# Altium PCB RecycleBin-4-V8.pcbdoc (part 2 of 2)
Units mm, origin at the board's own origin, x right, y up, seen from the top; angles counter-clockwise.
Board outline 100 x 100 mm, 2 copper layers (Top Layer, Bottom Layer); 155 components, 225 nets, 519 pads, 228 vias.
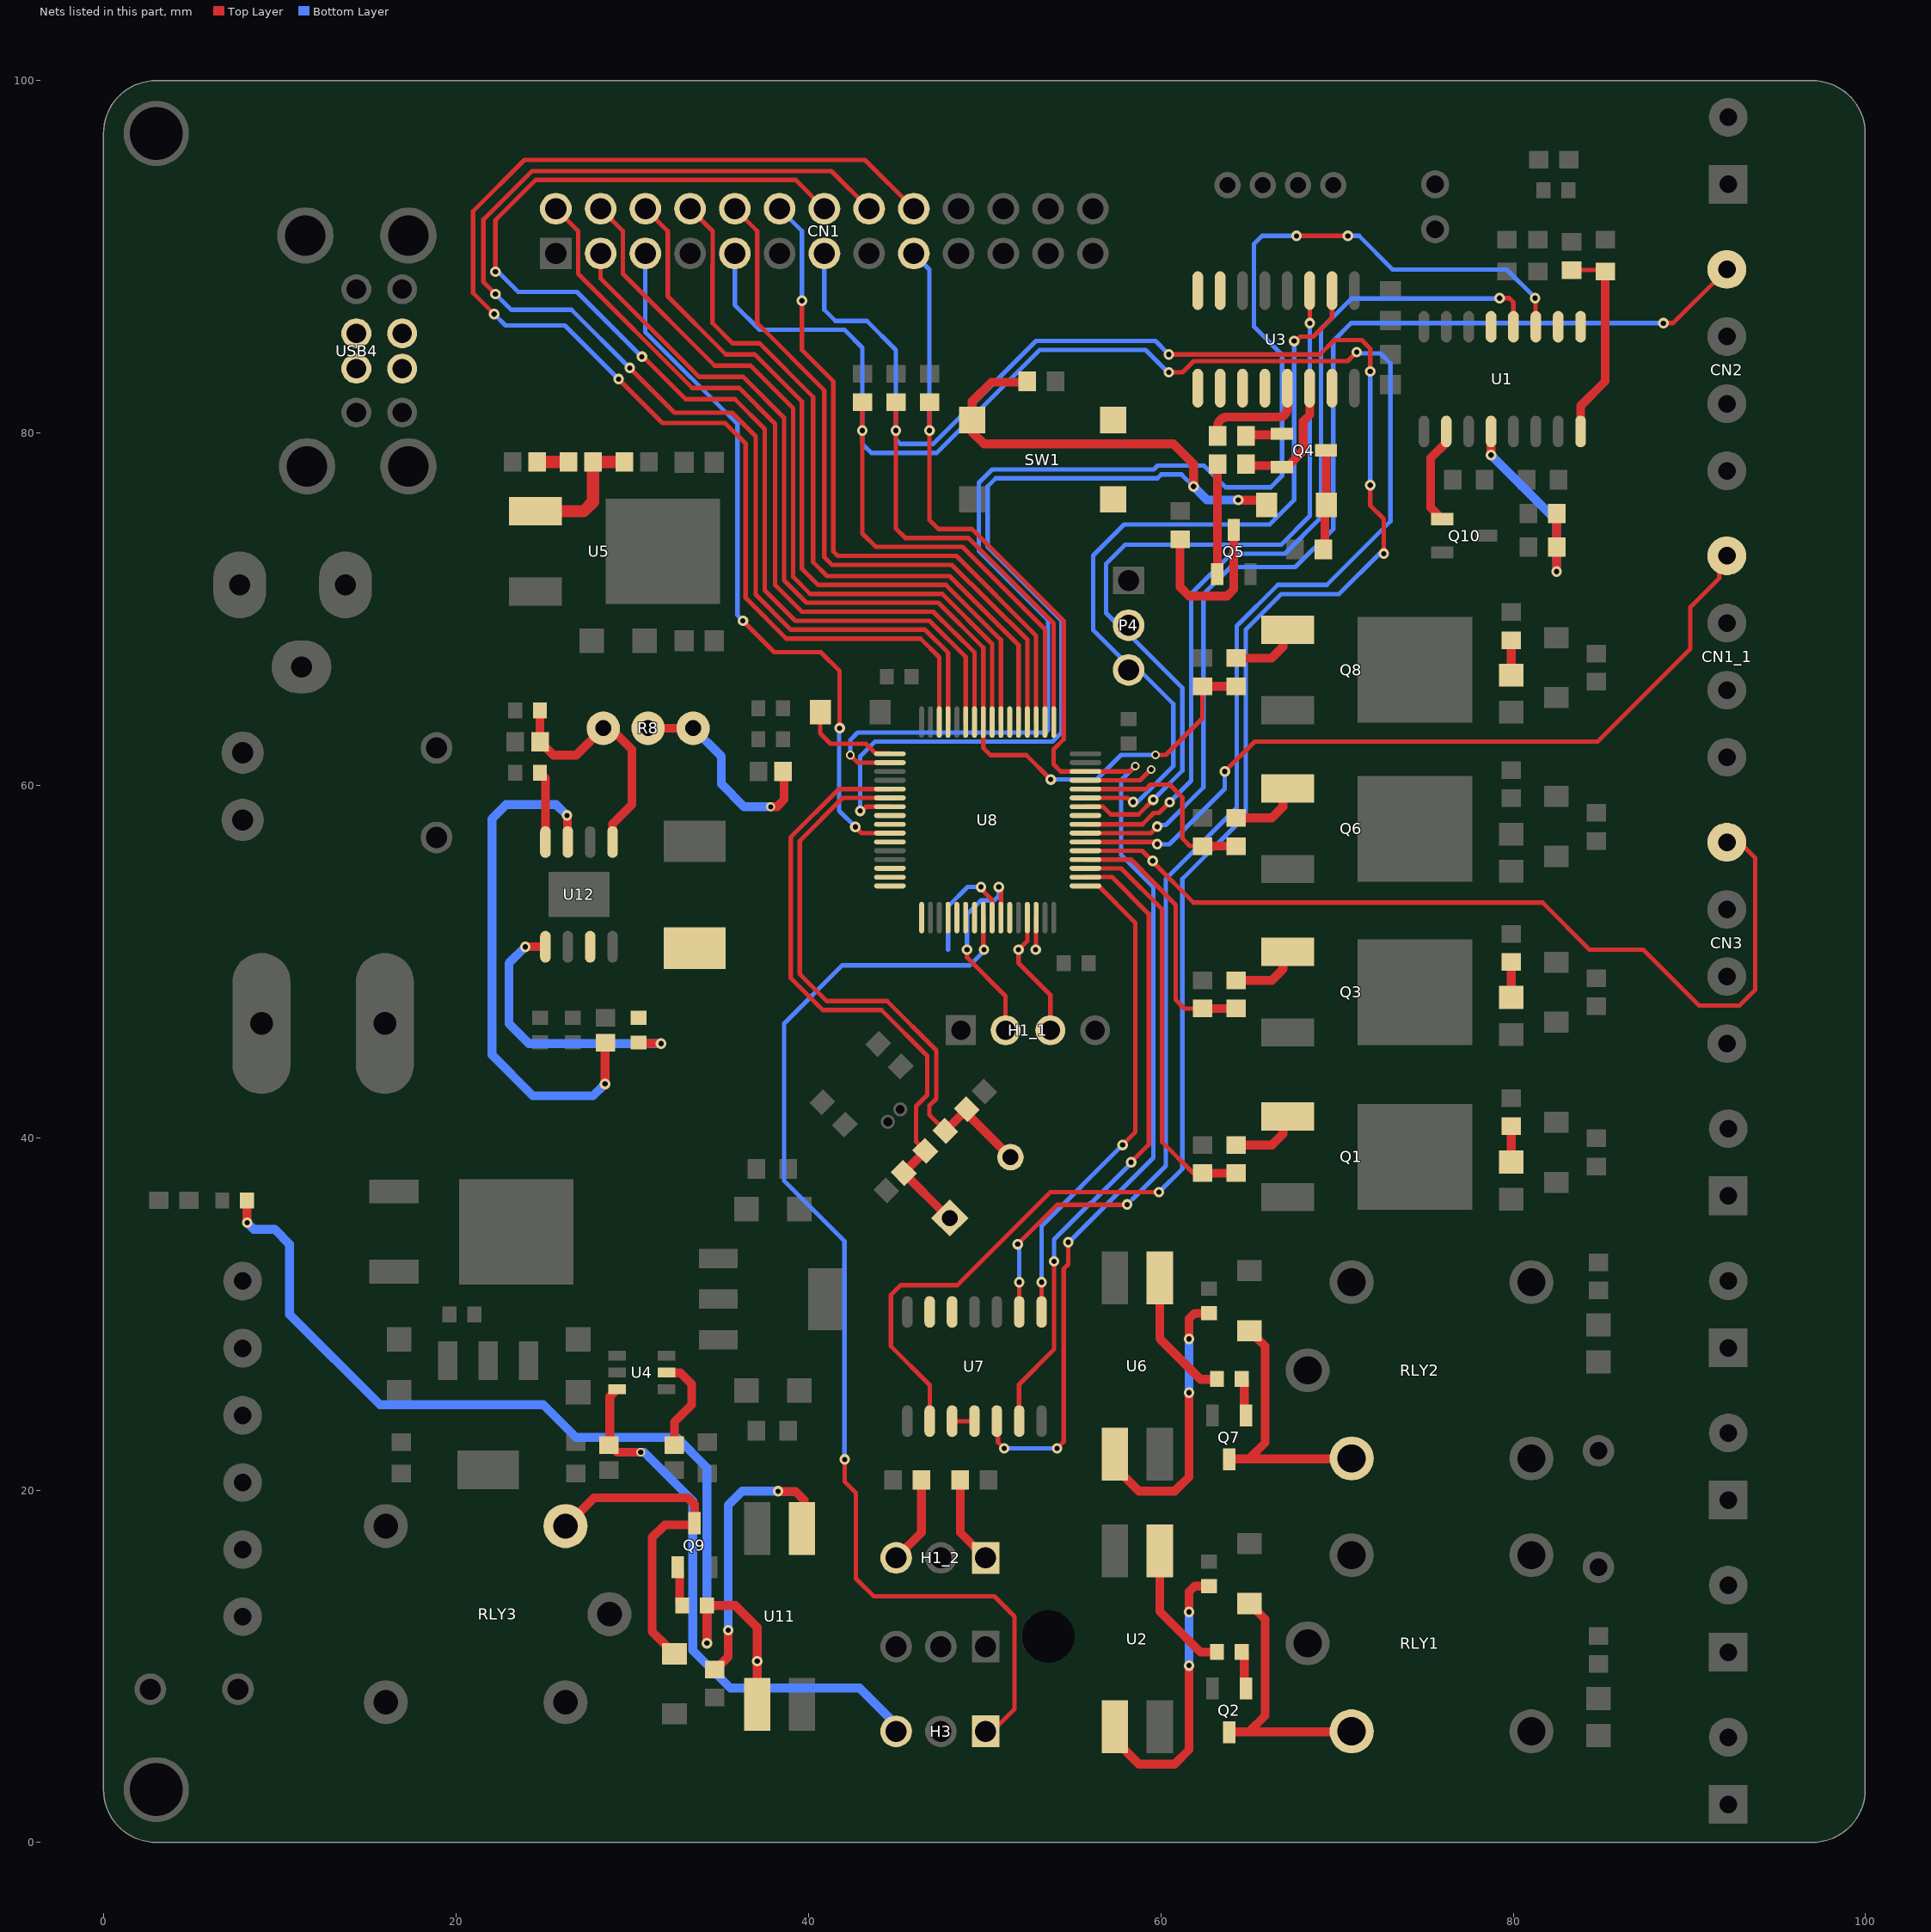
[diagram p2: the nets of this part, all layers, seen from the top]

## Via types
v1: diameter 0.6, hole 0.3, Top Layer to Bottom Layer, 152 vias
v2: diameter 0.5, hole 0.3, Top Layer to Bottom Layer, 59 vias
v3: diameter 1.2, hole 0.6, Top Layer to Bottom Layer, 10 vias
v4: diameter 0.4, hole 0.2, Top Layer to Bottom Layer, 3 vias
v5: diameter 1.5, hole 0.8, Top Layer to Bottom Layer, 2 vias
v6: diameter 3, hole 1.6, Top Layer to Bottom Layer, 2 vias

## Nets (pads, with @x,y where several pads share a name; then routed paths per layer and width w, separated by ;. In a path a pad name is that pad's centre, name@x,y a point inside that pad or via, vN(x,y) a via of type N, cw(c..) or ccw(c..) an arc to the next point about the centre after c; other vN are vias at no path point) (continued)
OSC_IN: C22.2 R48.1 U8.5 X1.1 | length 35.5
  Top Layer w0.254: U8.5@44.615,59.789 43.621,59.789 43.612,59.781 41.707,59.781 38.989,57.063 38.989,49.066 40.811,47.244 44.134,47.244 46.736,44.642 46.736,42.421 46.101,41.786 46.101,39.78 R48.1@46.627,39.253
  Top Layer w0.5: R48.1@46.627,39.253 46.627,39.238 45.402,38.013 C22.2@45.402,37.998 47.761,35.639 X1.1@47.761,35.441
OSC_OUT: C25.2 R48.2 U8.6 X1.2 | length 33.8
  Top Layer w0.254: U8.6@44.615,59.289 41.93,59.289 39.497,56.84 39.497,49.276 41.021,47.752 44.45,47.752 47.244,44.958 47.244,42.21 46.863,41.829 46.863,41.287 47.759,40.391 R48.2@47.759,40.385
  Top Layer w0.5: R48.2@47.759,40.391 C25.2@48.984,41.617 ; C25.2@48.984,41.624 C25.2@48.984,41.617 ; X1.2@51.463,38.89 48.984,41.369 C25.2@48.984,41.617
OUT_HALL: 
OUT_LM: 
PA0: U8.14
PA1: U8.15
PA2: U8.16
PA3: U8.17
PA4: U8.20
PA5: U8.21
PA6: U8.22
PA7: U8.23
PA8: U8.41
PA11: R20.1 R21.1 U8.44 | length 11.5
  Top Layer w0.254: U8.44@55.715,59.789 59.147,59.789 59.397,60.039 60.491,60.039 61.214,59.316 61.214,56.985 61.651,56.548 R21.1@62.357,56.548
  Top Layer w0.5: R21.1@62.357,56.548 R20.1@64.262,56.548
PA12: U8.45 | length 4
  Top Layer w0.254: U8.45@55.715,60.289 58.817,60.289 v2@59.447,60.919
  other v2: 59.442,60.89
PA13: CN1.17 R37.1 U7.12 U8.46 | length 88.1
  Top Layer w0.254: CN1.17@45.409,89.624 CN1.17@45.974,90.19 ; R37.1@46.813,81.75 R37.1@46.863,81.75 v1(46.863,80.137) 46.863,75.057 47.371,74.549 49.277,74.549 54.483,69.343 54.483,62.618 53.915,62.051 53.915,61.185 54.311,60.789 U8.46@55.715,60.789 58.249,60.789 v2(58.547,61.087) ; U7.12@50.685,23.911 50.751,23.845 50.751,22.72 v1(51.106,22.366) ; v1(54.102,22.366) 54.483,22.747 54.483,32.561 54.739,32.816 v1(54.739,34.066)
  Bottom Layer w0.254: CN1.17@45.974,90.19 45.974,90.156 46.863,89.267 v1(46.863,80.137) ; v1(51.106,22.366) v1(54.102,22.366) ; v1@54.737,34.036 59.563,38.862 59.563,54.229 57.739,56.053 57.739,60.279 v2(58.547,61.087)
PA14: CN1.13 R36.1 U7.9 U8.49 | length 148.9
  Top Layer w0.254: R36.1@44.957,81.75 R36.1@44.957,81.75 v1(44.958,80.137) 44.958,74.569 45.486,74.041 49.066,74.041 53.915,69.192 U8.49@53.915,63.589 ; U7.9@46.875,23.911 46.875,25.957 44.67,28.162 44.67,31.077 45.216,31.623 48.44,31.623 53.724,36.907 v1(59.888,36.907) ; v1(60.452,84.455) 69.024,84.455 69.837,85.268 71.397,85.268 71.882,84.783 v1(71.882,83.488) ; v1(71.882,77.038) 71.882,75.88 72.644,75.118 v1(72.644,73.152)
  Bottom Layer w0.254: CN1.13@40.894,90.19 40.894,86.995 41.529,86.36 43.307,86.36 44.958,84.709 v1(44.958,80.137) 44.958,79.629 45.212,79.375 47.064,79.375 52.906,85.217 59.69,85.217 v1(60.452,84.455) v1@60.533,84.455 ; v1(59.888,36.907) 61.214,38.233 61.214,54.689 64.816,58.291 64.816,68.839 66.826,70.849 70.096,70.849 72.4,73.152 v1(72.644,73.152) ; v1(71.882,77.038) v1(71.882,83.488)
PA15: CN1.9 R35.1 U7.2 U8.50 | length 142
  Top Layer w0.254: R35.1@43.053,81.75 v1(43.053,80.137) 43.053,74.295 43.815,73.533 48.74,73.533 53.415,68.858 U8.50@53.415,63.589 ; v1(51.869,33.95) 54.114,36.195 58.069,36.195 v1(58.085,36.211) ; U7.2@51.955,30.111 v1(51.955,31.797) ; v1(60.452,83.439) 61.228,83.439 61.863,84.074 70.601,84.074 v1(71.115,84.587)
  Bottom Layer w0.254: CN1.9@35.814,90.19 35.814,87.249 37.211,85.852 42.037,85.852 43.053,84.836 v1(43.053,80.137) 43.053,79.375 43.561,78.867 47.274,78.867 53.116,84.709 59.136,84.709 v1@60.406,83.439 ; v1(51.869,33.95) 51.955,33.864 v1(51.955,31.797) ; 58.373,36.499 60.277,38.403 60.277,54.689 64.308,58.72 64.308,69.049 66.633,71.374 69.413,71.374 73.025,74.986 73.025,83.947 72.451,84.521 71.181,84.521 v1(71.115,84.587)
PB0: H1_1.2 U8.26 | length 12
  Top Layer w0.254: v1(48.994,50.673) 48.994,50.231 51.181,48.044 H1_1.2@51.181,46.101 ; v1(50.8,54.229) 50.8,54.135 50.915,54.02 U8.26@50.915,52.489
  Bottom Layer w0.254: v1(48.994,50.673) 48.994,52.677 49.784,53.467 50.546,53.467 50.8,53.721 v1(50.8,54.229)
PB1: U8.27
PB3: CN1.6 U8.55 | length 42.7
  Top Layer w0.254: CN1.6@30.734,92.73 32.004,91.46 32.004,87.757 35.306,84.455 36.957,84.455 39.624,81.788 39.624,72.285 40.535,71.374 47.792,71.374 50.915,68.251 U8.55@50.915,63.589
PB4: CN1.4 U8.56 | length 43.9
  Top Layer w0.254: CN1.4@28.194,92.73 29.464,91.46 29.464,89.027 34.671,83.82 36.703,83.82 39.116,81.407 39.116,71.838 40.088,70.866 47.581,70.866 50.423,68.024 50.423,67.814 ; U8.56@50.415,63.589 50.419,67.814
PB5: CN1.3 R32.1 R33.1 U8.57 | length 61.3
  Top Layer w0.254: CN1.3@28.194,90.19 28.194,88.773 33.782,83.185 36.284,83.185 38.608,80.861 38.608,71.628 39.878,70.358 47.371,70.358 49.915,67.814 U8.57@49.915,63.589 49.915,62.12 50.324,61.711 52.363,61.711 v1(53.745,60.329) ; v2(59.69,61.722) 60.277,61.722 62.357,63.802 R32.1@62.357,65.621
  Top Layer w0.5: R32.1@62.357,65.621 R33.1@64.262,65.621
  Bottom Layer w0.254: v1(53.745,60.329) 56.346,60.329 57.74,61.722 v2(59.69,61.722)
PB6: CN1.2 U8.58 | length 44.9
  Top Layer w0.254: CN1.2@25.654,92.73 26.924,91.46 26.924,89.027 33.401,82.55 36.068,82.55 38.1,80.518 38.1,71.374 39.624,69.85 47.073,69.85 49.415,67.542 U8.58@49.415,63.589
PB7: CN1.14 U8.59 | length 67.8
  Top Layer w0.254: v1(22.225,89.154) 22.225,92.075 24.511,94.361 39.263,94.361 CN1.14@40.894,92.73 ; v1@30.572,84.363 33.02,81.915 35.814,81.915 37.507,80.222 37.507,71.079 39.244,69.342 46.863,69.342 48.915,67.29 U8.59@48.915,63.589
  Bottom Layer w0.254: v1@22.372,89.154 23.515,88.011 26.855,88.011 v1(30.538,84.328)
PB8: CN1.16 U8.61 | length 71.8
  Top Layer w0.254: v1@22.151,87.884 v1(22.225,87.884) 21.544,88.565 21.544,92.112 24.301,94.869 39.473,94.869 41.295,94.869 CN1.16@43.434,92.73 ; v1(29.845,83.693) 32.385,81.153 35.651,81.153 36.999,79.805 36.999,70.824 38.989,68.834 46.609,68.834 47.915,67.528 U8.61@47.915,63.589
  Bottom Layer w0.254: v1(22.225,87.884) 23.114,86.995 26.543,86.995 v1(29.845,83.693)
PB9: CN1.18 U8.62 | length 76.2
  Top Layer w0.254: v1(22.151,86.747) 20.955,87.943 20.955,92.583 23.876,95.504 ; 24.257,95.504 23.876,95.504 ; v1(29.21,83.058) 31.702,80.566 35.258,80.566 36.43,79.394 36.43,70.631 38.735,68.326 46.355,68.326 47.415,67.266 U8.62@47.415,63.589 ; CN1.18@45.974,92.73 43.2,95.504 23.876,95.504
  Bottom Layer w0.254: v1(22.151,86.747) 22.792,86.106 26.162,86.106 v1(29.21,83.058)
PB10: H1_1.3 U8.29 | length 7.3
  Top Layer w0.254: U8.29@52.415,52.489 52.415,51.173 v1(51.915,50.673) 51.915,49.908 53.721,48.102 H1_1.3@53.721,46.101
PB11: U8.30 | length 1.8
  Top Layer w0.254: v1(52.892,50.673) 52.915,50.696 U8.30@52.915,52.489
PB12: U7.1 U8.33 | length 28
  Top Layer w0.254: U7.1@53.225,30.111 v1(53.225,31.797) ; U8.33@55.715,54.289 55.727,54.277 56.467,54.277 58.547,52.197 58.547,40.31 v1(57.823,39.586)
  Bottom Layer w0.254: v1(53.225,31.797) 53.225,34.988 v1(57.823,39.586) v1@57.823,39.535
PB13: U7.13 U8.34 | length 36.3
  Top Layer w0.254: U7.13@51.955,23.911 51.949,23.917 51.949,26.004 53.936,27.991 v1(53.936,32.977) ; U8.34@55.715,54.789 57.225,54.789 59.309,52.705 59.309,39.608 v1@58.182,38.481
  Bottom Layer w0.254: v1(53.936,32.977) 53.936,34.226 56.004,36.294 56.05,36.294 58.182,38.426 v1@58.182,38.481
  other v1: 58.309,38.608
PB14: R10.1 R12.1 U8.35 | length 23.5
  Top Layer w0.254: U8.35@55.715,55.289 57.741,55.289 60.071,52.959 60.071,39.751 61.835,37.987 R12.1@62.357,37.987
  Top Layer w0.5: R12.1@62.357,37.987 R10.1@64.262,37.987
PB15: R5.1 R6.1 U8.36 | length 15.2
  Top Layer w0.254: U8.36@55.715,55.789 58.293,55.789 60.833,53.213 60.833,47.83 61.33,47.333 R6.1@62.357,47.333
  Top Layer w0.5: R6.1@62.357,47.333 R5.1@64.262,47.333
PC0: U8.8
PC2: CN1.5 U8.10 | length 41.3
  Top Layer w0.254: v1(36.275,69.342) 38.053,67.564 40.691,67.564 41.758,66.497 41.758,66.422 41.762,66.418 v1(41.762,63.246) ; v1@42.747,57.635 v1(42.654,57.635) 43,57.289 U8.10@44.615,57.289
  Bottom Layer w0.254: CN1.5@30.734,90.19 30.734,85.725 35.961,80.498 35.961,69.656 v1(36.275,69.342) ; v1(41.762,63.246) 41.733,63.216 41.733,58.556 v1(42.654,57.635)
PC3: U8.11
PC4: H3.1 U8.24 | length 65.1
  Top Layer w0.254: v1(42.054,21.74) 42.054,20.474 42.685,19.843 42.685,14.978 43.693,13.97 50.546,13.97 51.689,12.827 51.689,7.565 H3.1@50.431,6.307 ; U8.24@49.915,52.489 49.915,50.84 v1@49.955,50.8
  Bottom Layer w0.254: v1(42.054,21.74) 42.037,21.758 42.037,34.125 38.608,37.554 38.608,46.482 41.91,49.784 49.149,49.784 49.955,50.59 v1(49.955,50.673) v1@49.955,50.8
PC5: U8.25 | length 6.8
  Top Layer w0.254: v1(49.784,54.229) 49.85,54.163 49.85,54.049 50.415,53.484 U8.25@50.415,52.489
  Bottom Layer w0.254: 47.915,50.673 47.915,53.122 49.022,54.229 v1(49.784,54.229)
PC6: CN3.4 U8.37 | length 51.9
  Top Layer w0.254: U8.37@55.715,56.289 58.936,56.289 v1@59.518,55.708 ; v1@59.635,55.808 59.635,55.554 61.849,53.34 81.661,53.34 84.328,50.673 87.376,50.673 90.551,47.498 92.837,47.498 93.726,48.387 93.726,55.88 92.837,56.769 CN3.4@92.122,56.769 CN3.4@91.741,56.769
  other v1: 59.535,55.708
PC7: CN1_1.4 U8.38 | length 44.7
  Top Layer w0.254: U8.38@55.715,56.789 59.662,56.789 v1(59.789,56.662) ; v1(63.627,60.789) 65.322,62.484 84.789,62.484 90.043,67.738 90.043,70.104 91.694,71.755 CN1_1.4@91.694,72.263
  Bottom Layer w0.254: v1@59.804,56.647 60.472,56.647 63.627,59.802 v1(63.627,60.789)
PC8: CN2.4 U8.39 | length 62.1
  Top Layer w0.254: U8.39@55.715,57.289 59.42,57.289 v1(59.789,57.658) ; v1(88.519,86.233) 89.074,86.233 91.741,88.9 CN2.4@91.741,89.281
  Bottom Layer w0.254: v1@59.831,57.743 60.277,57.743 62.414,59.88 62.414,70.849 63.955,72.39 67.628,72.39 69.786,74.548 69.786,85.217 70.802,86.233 v1(88.519,86.233)
PC9: U1.12 U8.40 | length 50.6
  Top Layer w0.254: U8.40@55.715,57.789 58.951,57.789 59.595,58.434 59.888,58.434 v1(60.493,59.039) ; v1(79.225,87.653) 79.766,87.653 80.01,87.409 U1.12@80.01,86.03
  Bottom Layer w0.254: v1(60.493,59.039) 61.722,60.268 61.722,70.875 63.999,73.152 67.036,73.152 69.088,75.204 69.088,85.905 70.813,87.63 v1@79.225,87.63
PC10: CN1.12 U8.51 | length 39.1
  Top Layer w0.254: v1(39.624,87.503) 39.624,84.709 41.402,82.931 41.402,73.279 41.656,73.025 48.387,73.025 52.915,68.497 U8.51@52.915,63.589
  Bottom Layer w0.254: CN1.12@38.354,92.73 39.624,91.46 v1(39.624,87.503)
PC11: CN1.10 U8.52 | length 40
  Top Layer w0.254: CN1.10@35.814,92.73 37.084,91.46 37.084,86.233 40.894,82.423 40.894,72.949 41.326,72.517 48.133,72.517 52.415,68.263 U8.52@52.415,63.589
PC12: CN1.8 U8.53 | length 41.8
  Top Layer w0.254: CN1.8@33.274,92.73 34.565,91.439 34.544,87.757 34.544,86.233 35.687,85.09 37.211,85.09 40.259,82.042 40.259,72.669 41.046,71.882 48.002,71.882 51.915,67.969 U8.53@51.915,63.589
PC13: U1.11 U8.2 | length 81.9
  Top Layer w0.254: v2(42.364,61.716) 42.791,61.289 U8.2@44.615,61.289 ; v1(67.691,91.186) v1(70.612,91.186) ; v1(81.236,87.653) 81.258,87.631 81.258,86.052 U1.11@81.28,86.03
  Bottom Layer w0.254: v2(42.364,61.716) 42.364,62.57 42.786,62.992 53.445,62.992 53.594,63.141 53.594,69.386 49.657,73.323 49.657,77.172 50.417,77.932 59.591,77.932 59.81,78.151 62.438,78.151 63.673,76.916 66.228,76.916 66.873,77.561 66.873,84.443 65.278,86.038 65.278,90.726 65.738,91.186 v1(67.691,91.186) ; v1(70.612,91.186) 71.247,91.186 73.152,89.281 79.629,89.281 v1@81.246,87.664
PD2: U8.54
Q1_1: Q1.1 R10.2 | length 4
  Top Layer w0.5: R10.2@64.262,39.586 66.294,39.586 66.929,40.221 66.929,40.939 Q1.1@67.188,41.198
Q4_1: Q4.1 R24.2 | length 2.1
  Top Layer w0.5: R24.2@64.819,79.831 64.881,79.893 66.804,79.893 Q4.1@66.867,79.956
Q4_2: Q4.2 R25.1 U3.14 | length 7.4
  Top Layer w0.5: R25.1@64.82,78.244 64.913,78.15 67.236,78.15 68.072,78.986 68.072,80.645 68.453,81.026 68.453,82.53 U3.14@68.442,82.541
Q4_3: D6.1 Q4.3 R23.1 | length 5.7
  Top Layer w0.5: R23.1@69.216,73.389 69.303,73.476 69.303,75.824 69.378,75.899 69.378,78.993 Q4.3@69.366,79.006
Q5_1: Q5.1 R25.2 | length 6.3
  Top Layer w0.5: Q5.1@63.185,71.995 63.202,72.012 63.202,78.226 R25.2@63.22,78.244
Q5_3: Q5.3 R26.2 | length 9.5
  Top Layer w0.5: R26.2@61.087,73.969 61.087,71.247 61.595,70.739 63.754,70.739 64.135,71.12 Q5.3@64.135,74.494
Q6_1: Q6.1 R20.2 | length 4
  Top Layer w0.5: R20.2@64.262,58.147 66.294,58.147 66.929,58.782 66.929,59.5 Q6.1@67.188,59.76
Q7_1: Q7.1 R18.2 | length 2.2
  Top Layer w0.5: R18.2@64.581,26.308 64.731,26.158 64.731,24.337 Q7.1@64.831,24.237
Q9_3: D10.2 Q9.3 RLY3.2 | length 19.2
  Top Layer w0.5: RLY3.2@26.203,17.954 27.807,19.558 33.147,19.558 33.528,19.177 Q9.3@33.528,18.119 Q9.3@33.528,18.018 ; D10.2@32.385,10.704 32.285,10.704 31.935,11.054 31.935,11.154 31.115,11.974 31.115,17.304 31.829,18.018 Q9.3@33.528,18.018 ; Q9.3@33.528,18.014 Q9.3@33.528,18.018
Q10_1: Q10.1 U1.2 | length 5.6
  Top Layer w0.5: Q10.1@75.966,75.118 75.311,75.773 75.311,78.571 76.2,79.46 U1.2@76.2,80.086
R5_2: Q3.1 R5.2 | length 4
  Top Layer w0.5: R5.2@64.262,48.933 66.294,48.933 66.929,49.568 66.929,50.286 Q3.1@67.188,50.545
R11_1: 
R14_1: LED4.1 R14.1 | length 2
  Top Layer w0.5: LED4.1@79.883,38.614 R14.1@79.883,40.654
R15_1: R15.1 U2.3 | length 7.7
  Top Layer w0.5: U2.3@59.93,16.557 59.93,13.118 62.249,10.799 63.162,10.799 R15.1@63.181,10.818
R15_2: Q2.1 R15.2 | length 2.2
  Top Layer w0.5: R15.2@64.581,10.814 64.731,10.664 64.731,8.843 Q2.1@64.831,8.743
R17_2: 
R18_1: R18.1 U6.3 | length 7.7
  Top Layer w0.5: U6.3@59.93,32.047 59.93,28.608 62.249,26.289 63.162,26.289 R18.1@63.181,26.308
R22_1: LED1.1 R22.1 | length 2
  Top Layer w0.5: LED1.1@79.883,47.961 R22.1@79.883,49.974
R24_1: R24.1 U3.13 | length 6.1
  Top Layer w0.5: R24.1@63.219,79.831 63.219,80.364 cw(c63.754,80.364) 63.754,80.899 66.675,80.899 ccw(c66.675,81.407) 67.183,81.407 ; U3.13@67.194,81.534 U3.13@67.194,82.541
R28_1: H1_2.1 R28.1 | length 5
  Top Layer w0.5: R28.1@48.614,20.573 48.614,17.586 H1_2.1@50.05,16.15
R29_2: H1_2.3 R29.2 | length 5
  Top Layer w0.5: H1_2.3@44.97,16.15 46.406,17.586 R29.2@46.406,20.573
R31_1: LED6.1 R31.1 | length 2
  Top Layer w0.5: LED6.1@79.883,66.249 R31.1@79.883,68.228
R32_3: R38.2 R39.1 | length 1.8
  Top Layer w0.7: R38.2@24.591,78.359 R39.1@26.366,78.359
R33_2: Q8.1 R33.2 | length 4
  Top Layer w0.5: R33.2@64.262,67.221 66.294,67.221 66.929,67.856 66.929,68.574 Q8.1@67.188,68.833
R38_2: R39.2 R41.1 U5.1 | length 7.5
  Top Layer w0.7: U5.1@24.491,75.564 27.241,75.564 27.766,76.088 R39.2@27.766,78.359 R41.1@29.533,78.359
R43_2: 
R44_1: 
R53_1: 
R54_1: R13.1 R54.1 U11.3 | length 55.5
  Top Layer w0.5: R13.1@8.124,36.449 R13.1@8.116,36.441 8.122,36.435 8.122,35.185 v1(8.128,35.179) ; v1(34.228,11.306) 34.228,13.065 34.417,13.254 R54.1@34.228,13.443 35.847,13.443 37.084,12.206 v1(37.084,10.287) U11.3@37.084,7.827
  Bottom Layer w0.5: v1(8.128,35.179) 8.513,34.794 9.698,34.794 10.541,33.951 10.541,29.972 15.675,24.838 24.946,24.838 26.797,22.987 32.512,22.987 34.228,21.271 v1(34.228,11.306)
R54_2: Q9.1 R54.2 | length 2.2
  Top Layer w0.5: Q9.1@32.578,15.514 32.678,15.414 32.678,13.593 R54.2@32.828,13.443
R55_2: R8.2 R8.3 R17.2 | length 12.3
  Top Layer w0.5: R8.2@30.887,63.24 R8.3@33.447,63.24 ; v2(37.846,58.781) 38.202,58.781 38.608,59.187 38.608,60.713 R17.2@38.546,60.775
  Bottom Layer w0.5: R8.3@33.447,63.24 35.052,61.636 35.052,60.071 36.334,58.789 v2@37.846,58.789
R57_2: C32.1 R57.2 U1.8 | length 11.6
  Top Layer w0.254: R57.2@83.312,89.244 85.144,89.244 C32.1@85.217,89.171
  Top Layer w0.5: U1.8@83.82,80.086 83.82,81.534 85.217,82.931 C32.1@85.217,89.171
R58_2: R58.2 R59.1 U1.4 | length 12.8
  Top Layer w0.5: v1(78.74,78.743) U1.4@78.74,80.086 ; v1(82.461,72.136) R59.1@82.461,73.533 R58.2@82.461,75.438
  Bottom Layer w0.5: v1(78.74,78.743) 82.461,75.022 v1(82.461,72.136)
RED_IO: 
RESET: D6.2 R27.2 SW1.1 U8.7 | length 69.4
  Top Layer w0.254: v1(42.926,58.547) 43.02,58.547 43.254,58.781 43.612,58.781 43.621,58.789 U8.7@44.615,58.789 ; R27.2@52.413,82.931 R27.2@52.451,82.969
  Top Layer w0.5: R27.2@52.413,82.931 52.413,82.881 50.369,82.881 49.29,81.802 SW1.1@49.29,80.736 49.29,80.045 49.96,79.375 60.706,79.375 61.849,78.232 v1(61.849,76.962) ; v1(64.389,76.2) 64.408,76.181 65.722,76.181 D6.2@65.991,75.912
  Bottom Layer w0.254: v1(42.926,58.547) 42.926,61.64 43.77,62.484 53.848,62.484 54.356,62.992 54.356,69.342 50.165,73.533 50.165,76.962 50.627,77.424 59.801,77.424 60.02,77.643 61.168,77.643 v1(61.849,76.962)
  Bottom Layer w0.5: v1(61.849,76.962) 62.611,76.2 v1(64.389,76.2)
RLY1_2: D2.2 Q2.3 RLY1.2 | length 15.1
  Top Layer w0.5: Q2.3@63.881,6.243 63.913,6.275 64.996,6.275 ; D2.2@65.024,13.557 65.124,13.557 65.474,13.207 65.474,13.107 65.913,12.668 65.913,7.192 64.996,6.275 ; RLY1.2@70.825,6.307 70.794,6.275 64.996,6.275
RLY2_2: D4.2 Q7.3 RLY2.2 | length 15.1
  Top Layer w0.5: Q7.3@63.881,21.737 63.911,21.767 64.994,21.767 ; D4.2@65.024,29.051 65.124,29.051 65.474,28.701 65.474,28.601 65.913,28.162 65.913,22.686 64.994,21.767 ; RLY2.2@70.825,21.797 70.796,21.767 64.994,21.767
RXD: P4.3 U3.2 U8.43 | length 46.1
  Top Layer w0.254: U8.43@55.715,59.289 56.71,59.289 56.718,59.281 58.1,59.281 58.326,59.055 v1(58.42,59.055) ; v1(67.564,85.217) 67.658,85.217 67.912,85.471 68.654,85.471 69.712,86.529 U3.2@69.712,88.078
  Bottom Layer w0.254: v1(58.42,59.055) 58.674,59.055 60.706,61.087 60.706,64.615 58.773,66.548 P4.3@58.166,66.548 58.166,66.802 56.15,68.818 56.15,73.041 57.912,74.803 66.17,74.803 67.564,76.197 v1(67.564,85.217)
S$8: 
S$67: 
S$68: 
S$69: 
S$111: 
S$113: 
S$117: 
S$119: 
S$121: 
S$123: 
S$176: 
S$180: 
S$182: 
S$188: 
S$190: 
S$192: 
S$194: 
S$196: 
S$198: 
S$200: 
S$203: 
S$205: 
S$207: 
S$209: 
S$211: 
S$213: 
S$215: 
S$217: 
S$219: 
S$221: 
S_IO1: 
S_IO2: 
SCK: 
SMG_BACK: H3.3 R45.2 U4.3 | length 31.5
  Top Layer w0.5: R45.2@28.671,22.544 R45.2@28.721,22.544 ; U4.3@29.133,25.72 28.721,25.308 R45.2@28.721,22.544 ; v2(30.47,22.148) 29.117,22.148 R45.2@28.721,22.544
  Bottom Layer w0.5: v2(30.47,22.148) 30.666,22.148 33.424,19.39 33.424,10.899 35.56,8.763 42.895,8.763 H3.3@45.16,6.498
SMOKE_IO: U8.9
SMOKE_OUT: 
SW1_2: SW1.2
SW1_4: SW1.4
TXD: P4.2 U3.3 U8.42 | length 46.2
  Top Layer w0.254: U8.42@55.715,58.789 56.712,58.789 57.151,58.35 58.145,58.35 ; 58.128,58.351 58.144,58.351 58.145,58.35 ; v1(59.563,59.182) 58.731,58.35 58.145,58.35 ; v1(68.453,86.233) U3.3@68.453,88.205
  Bottom Layer w0.254: v1(59.563,59.182) 61.214,60.833 61.214,65.532 58.166,68.58 P4.2@58.166,69.088 57.569,69.088 56.885,69.772 56.885,72.573 57.972,73.66 66.826,73.66 68.453,75.287 v1(68.453,86.233)
U1_9: U1.9
U1_10: U1.10
U1_13: U1.13
U2_1: R3.1 U2.1 | length 16.1
  Top Layer w0.5: U2.1@57.39,6.557 57.39,5.807 58.748,4.449 60.785,4.449 61.595,5.259 v1(61.595,10.037) ; v1(61.595,13.085) 61.595,14.228 61.911,14.544 R3.1@62.738,14.544
  Bottom Layer w0.5: v1(61.595,10.037) v1(61.595,13.085)
U3_7: U3.7
U3_8: U3.8
U3_9: U3.9
U3_10: U3.10
U3_11: U3.11
U3_12: U3.12
U3_15: U3.15
U4_1: C6.1 U12.1 | length 16.3
  Top Layer w0.5: v1@23.916,50.825 v1(23.922,50.831) 23.929,50.838 U12.1@25.062,50.838 ; C6.1@30.353,45.401 30.396,45.358 31.604,45.358 v1(31.623,45.339)
  Bottom Layer w0.5: v1(23.922,50.831) 22.987,49.896 22.987,46.482 24.13,45.339 v1(31.623,45.339)
U4_3: C6.2 L2.1 U12.3
U4_5: R43.2 U4.5 | length 5.6
  Top Layer w0.5: U4.5@31.933,26.67 31.958,26.645 32.727,26.645 33.362,26.01 33.362,24.838 32.385,23.861 R43.2@32.385,22.544
U4_7: R1.1 U12.7 | length 29.9
  Top Layer w0.5: v1(26.289,58.293) 26.289,58.266 26.313,58.242 26.313,56.801 U12.7@26.332,56.782 ; v1@28.45,42.975 28.45,45.376 R1.1@28.474,45.401
  Bottom Layer w0.5: v1(26.289,58.293) 25.671,58.911 22.84,58.911 22.025,58.096 22.025,44.704 24.352,42.377 27.772,42.377 v1(28.448,43.053)
U4_8: C5.2 U12.8 | length 4.1
  Top Layer w0.5: C5.2@24.752,60.706 25.062,60.396 U12.8@25.062,56.782
U4_12: R50.1 U11.1 | length 16.2
  Top Layer w0.5: R50.1@34.671,9.817 34.721,9.817 35.433,10.529 v1(35.433,12.046) ; v1(38.266,19.935) 38.285,19.916 39.266,19.916 39.751,19.431 39.751,17.954 U11.1@39.624,17.827
  Bottom Layer w0.5: v1(35.433,12.046) 35.433,19.139 36.229,19.935 v1(38.266,19.935)
U6_1: R2.1 U6.1 | length 16.1
  Top Layer w0.5: U6.1@57.39,22.047 57.39,21.297 58.748,19.939 60.785,19.939 61.595,20.749 v1(61.595,25.527) ; v1(61.595,28.575) 61.595,29.718 61.911,30.034 R2.1@62.738,30.034
  Bottom Layer w0.5: v1(61.595,25.527) v1(61.595,28.575)
U7_8: U7.5
U7_9: U7.6
U7_10: U7.10 U7.11 | length 1.3
  Top Layer w0.254: U7.10@48.145,23.911 U7.11@49.415,23.911
U7_11: 
U7_12: 
U7_13: 
U8_1: D8.1 U8.1 | length 5.6
  Top Layer w0.254: D8.1@40.664,64.152 40.664,62.94 41.237,62.367 43.244,62.367 43.801,61.81 U8.1@44.615,61.81
U12_5: C7.1 R8.1 R11.1 U12.5 | length 14.2
  Top Layer w0.5: C7.1@24.752,64.249 R11.1@24.752,62.478 25.52,61.711 26.817,61.711 R8.1@28.347,63.24 28.771,63.24 29.972,62.04 29.972,58.911 28.872,57.81 U12.5@28.872,56.782
U15_1: 
U15_3: 
U15_5: 
U15_6: 
U15_7: 
U15_8: 
U19_2: 
U20_4: 
USB4_2: USB4.2
USB4_3: USB4.3
USB4_6: USB4.6
USB4_7: USB4.7
W_IO1: 
W_IO2: 
pads on no net: CN7.4 RLY3.4 U4.4 U12.6

## Polygon pours and split planes (outlines as drawn)
GND on Bottom Layer "Top Layer-No Net" (solid, pour order 2): -0.026,3 -0.026,97 cw(c2.974,97) 2.974,100 96.974,100 cw(c96.974,97) 99.974,97 99.974,3 cw(c96.974,3) 96.974,0 2.974,0 cw(c2.974,3)
GND on Top Layer "Top Layer-No Net1" (solid, pour order 3): -0.026,3 -0.026,97 cw(c2.974,97) 2.974,100 96.974,100 cw(c96.974,97) 99.974,97 99.974,3 cw(c96.974,3) 96.974,0 2.974,0 cw(c2.974,3)

## Keep-outs
Keep-Out Layer:
  the board outline again, w0.254

## Other copper
Top Layer:
  region net 5V: 30.353,40.386 30.353,39.116 30.48,38.989 32.004,38.989 32.131,39.116 32.131,40.386 32.004,40.513 30.48,40.513
  region net 5V_32: 26.577,40.386 26.577,39.116 26.704,38.989 28.228,38.989 28.355,39.116 28.355,40.386 28.228,40.513 26.704,40.513
  region net 12V_IN: 13.3,18.732 13.3,18.36 15.039,16.621 16.755,16.621 17.62,17.486 17.62,19.075 16.779,19.916 16.059,19.916 15.039,21.431 13.3,21.144 13.3,21.094
  region net 5V_32: 15.172,33.147 14.915,32.89 14.915,30.445 16.002,29.359 16.002,28.063 16.176,27.89 17.83,27.89 19.05,26.67 19.939,26.67 20.338,27.069 20.338,30.886 19.956,31.268 18.818,31.268 18.034,32.052 18.034,32.803 17.699,33.138
  region net 3.3V_32IN: 21.751,40.386 21.751,39.116 21.878,38.989 23.402,38.989 23.529,39.116 23.529,40.386 23.402,40.513 21.878,40.513
  pour cut-out: 30.272,56.669 30.367,57.14 30.589,57.361 36.495,57.361 36.495,57.436 36.876,57.055 36.876,50.476 36.594,50.194 30.533,50.187 30.308,50.412 30.308,50.641
  region net 5V: 34.865,65.786 27.131,65.786 24.591,68.326 22.348,68.326 21.842,67.82 21.842,65.407 22.733,64.516 22.733,63.754 22.744,63.754 22.871,63.627 23.905,63.627 24.066,63.789 24.066,64.96 24.257,65.151 25.417,65.151 25.417,65.134 26.175,64.376 34.494,64.376 35.106,63.764 37.749,63.764
  region net 5V: 31.713,55.884 31.971,55.626 35.162,55.626 35.307,55.77 35.307,58.103 35.637,58.434 36.976,58.434 37.846,59.426 37.846,65.592 37.652,65.786 34.865,65.786 34.638,65.559 34.638,61.717 31.808,59.781
  region net U4_3: 27.241,51.848 27.068,51.661 27.068,49.35 28.031,48.387 29.337,48.387 29.591,48.133 29.591,46.47 29.833,46.228 31.356,46.228 34.862,46.228 35.369,46.809 35.369,50.379 35.244,50.673 31.808,50.673 31.716,50.103 31.231,49.619 28.642,49.619 28.257,50.083 28.257,51.661 27.972,51.848
  region net F1_2: 26.895,51.661
  region net F1_2: 26.895,51.661
  region net F1_2: 18.415,58.547 17.78,57.912 17.78,50.825 18.669,49.936 18.669,47.592 20.033,46.228 29.057,46.228 29.337,46.508 29.337,47.79 29.108,48.138 27.811,48.138 26.895,49.054 26.895,51.661 26.708,51.848 25.908,51.848 25.781,51.721 25.781,50.148 25.252,49.619 24.095,49.619 23.352,50.361 23.352,57.671 22.476,58.547
  region net 12V_KEY: 18.923,68.453 18.923,66.548 19.575,66.802 20.512,66.802 20.701,66.991 20.701,68.057 20.432,68.326 19.374,68.326
  region net 9V: 25.781,82.677 25.781,81.407 25.908,81.28 27.432,81.28 27.559,81.407 27.559,82.677 27.432,82.804 25.908,82.804
  region net 3.3V: 34.036,40.386 34.036,39.116 34.163,38.989 35.687,38.989 35.814,39.116 35.814,40.386 35.687,40.513 34.163,40.513
  region net 12V: 94.524,39.116 94.361,39.116 93.726,38.481 90.932,38.481 90.424,37.973 90.424,35.306 90.898,34.832 93.756,34.832 94.551,34.036 94.841,34.036 94.841,38.739 94.488,39.092
  region net 12V: 94.361,59.491 93.98,59.873 91.694,59.873 90.932,60.635 90.932,62.54 91.44,63.048 97.679,63.048 98.679,62.047 98.679,58.349 97.79,57.46 97.686,57.564 94.869,57.564
  region net 12V: 90.902,3.556 93.726,3.556 94.331,4.318 94.331,42.799 94.331,59.563 98.679,59.563 98.679,2.062 96.998,0.381 91.41,0.381 90.807,0.984
  pour cut-out: 0,53.309 0.159,53.309 1.016,54.166 19.05,54.166 19.05,53.721 19.685,53.086 19.685,39.93 19.673,39.93 18.669,38.926 0.698,38.926 0,39.624
  region net 12V: 94.524,21.844 94.361,21.844 93.726,21.209 90.932,21.209 90.424,20.701 90.424,18.034 90.898,17.56 93.756,17.56 94.551,16.764 94.841,16.764 94.841,21.467 94.488,21.82
  region net 12V: 94.38,48.232 94.257,48.11 93.265,47.117 89.341,47.117 89.963,46.379 89.963,43.942 90.437,43.468 93.295,43.468 94.09,42.672 94.38,42.672 94.38,47.435
  region: 100.457,28.575
  region net 12V: 94.524,30.48 94.361,30.48 93.726,29.845 90.932,29.845 90.424,29.337 90.424,26.67 90.898,26.196 93.756,26.196 94.551,25.4 94.841,25.4 94.841,30.103 94.488,30.456
  region: 100.584,36.195
  region: 93.091,42.672
  region: 101.346,59.436
  region: 93.345,-1.905
  region: 92.329,-1.778
  region: 100.33,95.758
  region net 12V_IN: 94.347,95.758 96.52,94.051 96.52,78.105 94.742,76.327 91.059,76.327 90.297,77.089 90.297,78.486 91.271,79.46 93.176,79.46 93.472,79.756 93.472,91.57 92.964,92.075 92.241,92.075 90.678,93.638 90.678,95.25 91.186,95.758
  region: 88.265,101.346
  region net 12V_IN: 86.995,99.314 89.408,98.298 90.297,97.409 91.948,95.758 92.837,95.758 93.345,95.25 93.345,92.71 92.71,92.075 90.17,92.075 87.757,94.488 85.794,96.451
  region net 12V_IN: 88.646,98.933
  region net 12V_IN: 5.715,57.658 0.994,57.658 0.508,62.006 0.508,90.805 9.017,99.314 88.392,99.314 89.408,98.298 89.408,96.266 13.688,96.266 5.715,88.293
  region net 12V_IN: 5.207,77.216 6.659,76.088 20.886,76.088 23.373,72.893 25.532,72.893 28.257,70.168 28.257,67.837 27.686,67.266 27.45,67.502 26.687,67.502 25.417,68.772 22.414,68.772 20.066,70.819 20.066,72.757 19,73.969 6.659,73.969 5.447,72.757
  region: -0.889,10.795
  region net 12V: 3.683,10.414 3.683,10.107 3.683,5.461 5.525,3.619 6.223,4.318 6.985,4.318 6.985,9.912 6.79,10.107
  region net 12V_KEY: 18.395,73.449 19.304,72.336 19.304,64.516 17.272,62.484 15.748,62.484 13.462,64.77 13.462,73.449
  region net GND: 17.263,4.699
  region net 12V: 17.62,0.381 8.763,0.381 5.334,3.81 5.334,5.206 5.334,8.039 7.582,10.287 13.335,10.287 14.331,9.291 14.331,7.146 18.021,3.455
  region net 12V: 6.101,26.665 7.112,25.654 9.144,25.654 9.525,25.273 9.525,23.057 9.201,22.733 7.311,22.733 6.062,21.484
  region net 12V: 3.284,33.762 9.144,33.762 9.525,33.381 9.525,30.861 9.204,30.54 7.364,30.54 6.128,29.304
  region net 12V: 29.644,15.574 30.48,14.738 30.48,10.397 29.9,9.817 14.915,9.817 11.684,5.715 12.417,6.827 11.684,5.715 3.805,5.858 3.805,9.335 1.016,11.005 1.016,32.351 2.723,33.762 5.591,33.762 6.35,33.003 6.35,12.234 7.315,11.306 8.893,11.306 9.906,12.319 9.906,14.351 11.032,15.477
  region net 12V_KEY: 11.43,72.898 11.981,73.449 17.276,73.449 17.404,55.015 11.938,49.784 11.938,43.991 10.238,42.291 8.128,42.291 6.35,44.069 6.35,53.477 9.906,57.033 9.906,58.928 9.182,59.652 7.569,59.652 6.35,60.871 6.35,64.111 7.136,64.897 12.446,64.897 13.335,65.786 13.335,67.82 11.432,69.723
  region: 4.572,50.421
  region net 12V_IN: 0.508,62.688 0.508,39.624 2.603,37.528 8.751,37.528 9.906,36.373 9.906,17.308 10.593,16.621 15.112,16.621 15.24,16.806 15.24,29.21 14.605,29.845 14.605,34.957 17.78,36.373 17.78,49.825 16.805,50.8 14.071,50.8 12.636,49.365 12.636,43.624 10.795,41.783 7.505,41.783 5.715,43.573 5.715,59.652
  pour cut-out: 29.89,6.774 30.298,7.182 30.298,18.855 29.913,19.24 14.619,19.24 14.224,18.845 14.224,7.11 14.56,6.774
  pour cut-out: 67.138,32.977 66.73,32.569 66.73,20.896 67.115,20.511 79.617,20.511 81.454,22.348 82.804,22.348 82.804,32.641 82.468,32.977
  pour cut-out: 67.138,17.487 66.73,17.079 66.73,5.406 67.115,5.021 79.617,5.021 81.454,6.858 82.804,6.858 82.804,17.151 82.468,17.487
  pour cut-out: 66.802,17.151
  pour cut-out: 56.374,29.974 56.642,30.242 56.642,30.353 60.706,30.353 60.958,30.101 60.974,30.101 60.974,24.005 60.722,23.753 56.668,23.753 56.642,23.727 56.374,23.995
  pour cut-out: 56.374,14.446 56.642,14.714 56.642,14.825 60.706,14.825 60.958,14.573 60.974,14.573 60.974,8.477 60.722,8.225 56.668,8.225 56.642,8.199 56.374,8.467
  pour cut-out: 36.054,15.748 36.322,16.016 36.322,16.127 40.386,16.127 40.638,15.875 40.654,15.875 40.654,9.779 40.402,9.527 36.348,9.527 36.322,9.501 36.054,9.769
  region net 12V: 10.428,9.041
  region: 90.344,71.846
  region: 11.531,36.235
  region: 16.002,14.478
Bottom Layer:
  region: 14.224,20.447
  pour cut-out: 30.272,56.669 30.367,57.14 30.589,57.361 36.495,57.361 36.495,57.436 36.876,57.055 36.876,50.476 36.594,50.194 30.533,50.187 30.308,50.412 30.308,50.641
  pour cut-out: 0,53.309 0.159,53.309 1.016,54.166 19.05,54.166 19.05,53.721 19.685,53.086 19.685,39.93 19.673,39.93 18.669,38.926 0.698,38.926 0,39.624
  region net 12V: 8.985,29.591 9.44,30.197 9.44,33.74 8.89,34.29 6.858,34.29 6.35,34.798 6.35,49.53 7.747,50.927 11.894,50.927 15.79,54.822 15.79,59.394 16.933,60.537 19.77,60.537 20.193,60.96 20.193,65.78 19.847,66.125 13.885,66.125 10.033,62.274 10.033,57.15 9.271,56.388 4.782,56.388 0.423,52.028 0.423,30.311 1.143,29.591
  pour cut-out: 29.89,6.774 30.298,7.182 30.298,18.855 29.913,19.24 14.619,19.24 14.224,18.845 14.224,7.11 14.56,6.774
  pour cut-out: 67.138,32.977 66.73,32.569 66.73,20.896 67.115,20.511 79.617,20.511 81.454,22.348 82.804,22.348 82.804,32.641 82.468,32.977
  pour cut-out: 67.138,17.487 66.73,17.079 66.73,5.406 67.115,5.021 79.617,5.021 81.454,6.858 82.804,6.858 82.804,17.151 82.468,17.487
  pour cut-out: 56.372,29.914 56.64,30.182 56.64,30.293 60.704,30.293 60.956,30.041 60.972,30.041 60.972,23.945 60.72,23.693 56.666,23.693 56.64,23.667 56.372,23.935
  pour cut-out: 56.374,14.427 56.642,14.695 56.642,14.806 60.706,14.806 60.958,14.554 60.974,14.554 60.974,8.458 60.722,8.206 56.668,8.206 56.642,8.18 56.374,8.448
  pour cut-out: 36.054,15.748 36.322,16.016 36.322,16.127 40.386,16.127 40.638,15.875 40.654,15.875 40.654,9.779 40.402,9.527 36.348,9.527 36.322,9.501 36.054,9.769

## Silkscreen, mask and mechanical layers (free items; w line width, h text height)
Top Overlay:
  region: 17.907,58.039
  lines w0.003: 32.685,66.969 32.736,67.02
  lines w0.254: 38.354,95.27 38.354,95.86 ; 43.434,95.27 43.434,95.86
  lines w0.4: 19.675,87.503 19.675,94.931
  text "CM+" at 24.765,98.044 h1.1
  text "CM-" at 27.305,98.044 h1.1
  text "HIO" at 30.099,98.044 h1.1
  text "RIO" at 32.512,98.044 h1.1
  text "echo" at 34.798,98.044 h1.1
  text "trig" at 37.592,98.044 h1.1
  text "CM7" at 40.005,98.044 h1.1
  text "CM8" at 42.672,98.044 h1.1
  text "CM9" at 45.212,98.044 h1.1
  text "E+" at 48.006,98.044 h1.1
  text "E-" at 50.546,98.044 h1.1
  text "A-" at 53.086,98.044 h1.1
  text "A+" at 55.499,98.044 h1.1
  text "MCU供电指示" at 75.819,97.79 h2.03
  text "串口通信" at 62.772,97.663 h2.03
  text "GND" at 62.444,96.51 h1.3
  text "D+" at 65.278,96.52 h1.3
  text "D-" at 67.278,96.52 h1.3
  text "5V" at 69.151,96.52 h1.3
  text "9V" at 25.019,96.393 h1.1
  text "SIO" at 27.432,96.393 h1.1
  text "RK" at 30.226,96.393 h1.1
  text "GND" at 32.258,96.393 h1.1
  text "TK" at 35.179,96.393 h1.1
  text "GND" at 37.338,96.393 h1.1
  text "BK" at 40.259,96.393 h1.1
  text "GND" at 42.418,96.393 h1.1
  text "FK" at 45.466,96.393 h1.1
  text "GND" at 47.625,96.393 h1.1
  text "3.3V" at 50.165,96.393 h1.1
  text "5V" at 52.959,96.393 h1.1
  text "GND" at 55.245,96.393 h1.1
  text "GND" at 90.043,96.266 h1.8 r90
  text "V" at 19.04,95.439 h2.5 r180
  text "PB6" at 24.765,94.107 h1.1
  text "PB4" at 27.305,94.107 h1.1
  text "PB3" at 29.845,94.107 h1.1
  text "PC12" at 32.131,94.107 h1.1
  text "PC11" at 34.925,94.107 h1.1
  text "PC10" at 37.338,94.107 h1.1
  text "PB7" at 40.005,94.107 h1.1
  text "PB8" at 42.545,94.107 h1.1
  text "PB9" at 45.085,94.107 h1.1
  text "E+" at 48.006,94.107 h1.1
  text "GND" at 50.038,94.107 h1.1
  text "A-" at 53.086,94.107 h1.1
  text "A+" at 55.499,94.107 h1.1
  text "K_12V" at 21.717,93.249 h1.1
  text "DOUT" at 57.531,93.24 h1.1
  text "12V" at 90.053,92.797 h1.8 r90
  text "PC4" at 21.717,92.097 h1.1
  text "PC9" at 57.531,92.097 h1.1
  text "无限流12V" at 88.265,90.971 h1.83 r90
  text "P_AD" at 21.717,90.455 h1.1
  text "SCK" at 57.531,90.446 h1.1
  text "PA1" at 21.717,89.302 h1.1
  text "PC13" at 57.531,89.303 h1.1
  text "NO" at 90.053,88.352 h1.8 r90
  text "9V" at 25.019,88.138 h1.1
  text "PB5" at 27.305,88.138 h1.1
  text "PC2" at 29.845,88.138 h1.1
  text "GND" at 32.131,88.138 h1.1
  text "PA15" at 34.671,88.138 h1.1
  text "GND" at 37.338,88.138 h1.1
  text "PA14" at 39.751,88.138 h1.1
  text "GND" at 42.545,88.138 h1.1
  text "PA13" at 44.831,88.138 h1.1
  text "GND" at 47.498,88.138 h1.1
  text "3.3V" at 50.038,88.138 h1.1
  text "5V" at 53.086,88.138 h1.1
  text "GND" at 54.991,88.138 h1.1
  text "灭火球反馈" at 93.091,86.916 h1.3
  text "USB供电" at 19.478,85.54 h2.03 r270
  text "PC8" at 95.504,85.471 h1.1
  text "COM" at 90.053,83.78 h1.8 r90
  text "9V" at 25.781,82.804 h1.8
  text "GND" at 90.053,79.97 h1.8 r90
  text "灭火球控制" at 87.998,79.027 h2.03 r90
  text "12V" at 90.053,76.414 h1.8 r90
  text "12V输入" at 15.875,74.041 h2.03 r270
  text "复位按键" at 49.276,73.279 h2.03
  text "NO" at 90.053,72.096 h1.8 r90
  text "下门锁反馈" at 93.091,71.455 h1.3
  text "GND" at 53.75,71.12 h1.5
  text "PC7" at 95.503,70.231 h1.1
  text "12V" at 18.772,68.58 h1.8
  text "TXD" at 54.014,68.58 h1.5
  text "COM" at 90.053,67.524 h1.8 r90
  text "RXD" at 53.932,66.04 h1.5
  text "PB5" at 62.357,63.754 h1.1
  text "GND" at 90.053,63.714 h1.8 r90
  text "12V" at 9.876,63.246 h1.8 r270
  text "12V输入" at 12.62,63.188 h2.03 r270
  text "下门电子锁" at 87.971,63.06 h2.03 r90
  text "灭火球" at 61.722,62.611 h1.2
  text "PB5" at 60.598,61.468 h1
  text "PA12" at 60.598,60.579 h1
  text "12V" at 90.053,60.285 h1.8 r90
  text "GND" at 9.896,59.857 h1.8 r270
  text "NO" at 90.053,55.713 h1.8 r90
  text "上门锁反馈" at 93.091,54.908 h1.3
  text "PA11" at 62.23,54.483 h1.1
  text "PC6" at 95.495,53.848 h1.1
  text "门电子锁" at 61.214,53.34 h1.2
  text "COM" at 90.053,51.395 h1.8 r90
  text "供电开关" at 20.06,50.038 h2.03 r270
  text "5V" at 48.006,47.706 h1.1
  text "PB0" at 50.263,47.693 h1.1
  text "PB10" at 52.578,47.693 h1.1
  text "GND" at 55.216,47.693 h1.1
  text "GND" at 90.053,47.458 h1.8 r90
  text "上门电子锁" at 87.971,46.896 h2.03 r90
  text "PB15" at 62.23,45.258 h1.1
  text "12V" at 90.053,44.029 h1.8 r90
  text "投口灯带" at 60.96,43.988 h1.2
  text "3.3V-32" at 20.147,40.64 h1.6
  text "5V-32" at 25.671,40.64 h1.6
  text "5V" at 30.425,40.639 h1.6
  text "3.3V" at 33.528,40.64 h1.6
  text "GND" at 90.053,38.695 h1.8 r90
  text "PB14" at 62.23,36.116 h1.1
  text "12V控制" at 9.779,36.068 h1.3
  text "12V风扇" at 87.987,35.433 h2.03 r90
  text "12V" at 90.053,35.393 h1.8 r90
  text "顶棚灯带" at 61.198,34.846 h1.2
  text "12V" at 9.876,33.258 h1.8 r270
  text "RK3288" at 11.731,33.114 h2.03 r270
  text "GND" at 90.053,30.313 h1.8 r90
  text "GND" at 9.896,29.869 h1.8 r270
  text "12V" at 90.053,26.757 h1.8 r90
  text "投口灯带" at 88.041,26.576 h2.03 r90
  text "12V" at 9.876,25.765 h1.8 r270
  text "触摸屏" at 11.731,25.494 h2.03 r270
  text "GND" at 9.896,22.503 h1.8 r270
  text "GND" at 90.053,21.55 h1.8 r90
  text "PB12" at 62.258,19.835 h1.1
  text "电机M-" at 61.722,18.796 h1.2
  text "12V" at 90.053,18.248 h1.8 r90
  text "12V" at 9.876,18.145 h1.8 r270
  text "顶棚灯带" at 88.084,18.067 h1.83 r90
  text "GND" at 46.089,18.024 h1.4
  text "B0" at 49.308,18.024 h1.4
  text "B1" at 44.158,18.007 h1.4
  text "广告屏" at 11.731,17.874 h2.03 r270
  text "FLASH" at 40.691,16.256 h1.1
  text "选择" at 40.856,14.981 h1.4
  text "GND" at 9.896,14.629 h1.8 r270
  text "M-" at 90.053,13.803 h1.8 r90
  text "无保护" at 43.18,12.587 h1.4
  text "有保护" at 47.752,12.587 h1.4
  text "32" at 41.402,11.303 h1.4
  text "供电" at 40.856,10.016 h1.4
  text "M+" at 90.053,9.866 h1.8 r90
  text "电机/推杆" at 88.338,8.509 h2.03 r90
  text "过流反馈" at 42.291,7.864 h1.4
  text "PC4" at 49.034,7.864 h1.4
  text "12V" at 41.2,5.963 h1.4
  text "外设供电" at 1.016,5.207 h2.2
  text "控制" at 40.811,4.699 h1.4
  text "PB13" at 62.23,4.468 h1.1
  text "GND" at 90.053,4.278 h1.8 r90
  text "电机M+" at 61.722,3.429 h1.2
  text "ARC-08K" at 76.2,1.143 h2.33
  text "智能回收控制板V8" at 26.035,1.016 h2.73
  text "广州艾米提智能科技" at 50.292,1.016 h2.33
  text "IMITEE" at 15.169,0.889 h2.53
  text "12V" at 90.053,0.849 h1.8 r90
  text "电机LED" at 88.01,0.795 h2.03 r90
Bottom Overlay:
  text "JLCJLCJLCJLC" at 89.789,1.397 h1
  text "OW：www.imitee.com" at 33.528,1.016 h3
Document:
  lines w0.003: 29.197,110.579 29.248,110.629